# Altium PCB PCB1.PcbDoc
Units mm, origin at the board's own origin, x right, y up, seen from the top; angles counter-clockwise.
Board outline 99.83 x 79.12 mm, 2 copper layers (Top Layer, Bottom Layer); 34 components, 53 nets, 212 pads, 34 vias.
Unrouted connection lines stored in the file: 1.
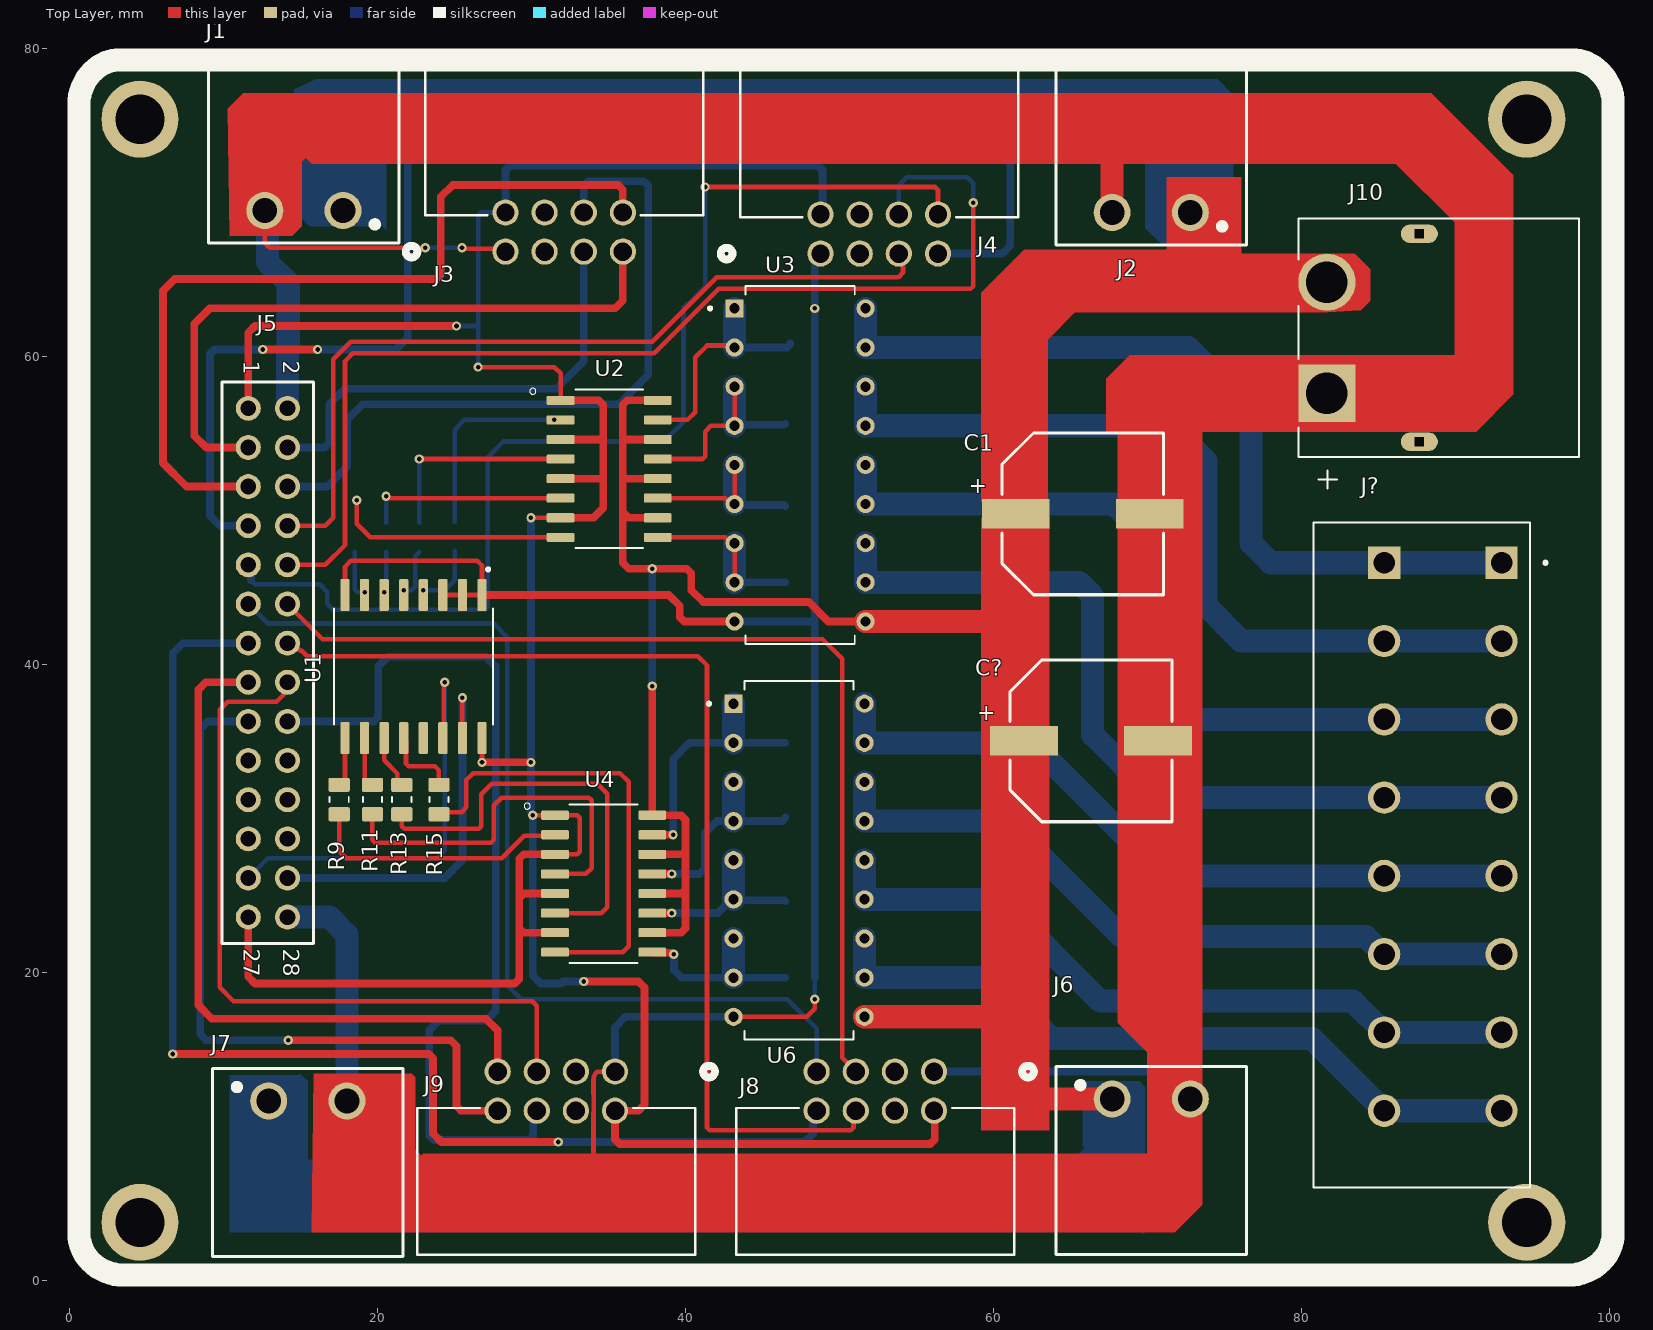
[diagram p0: Top Layer view]
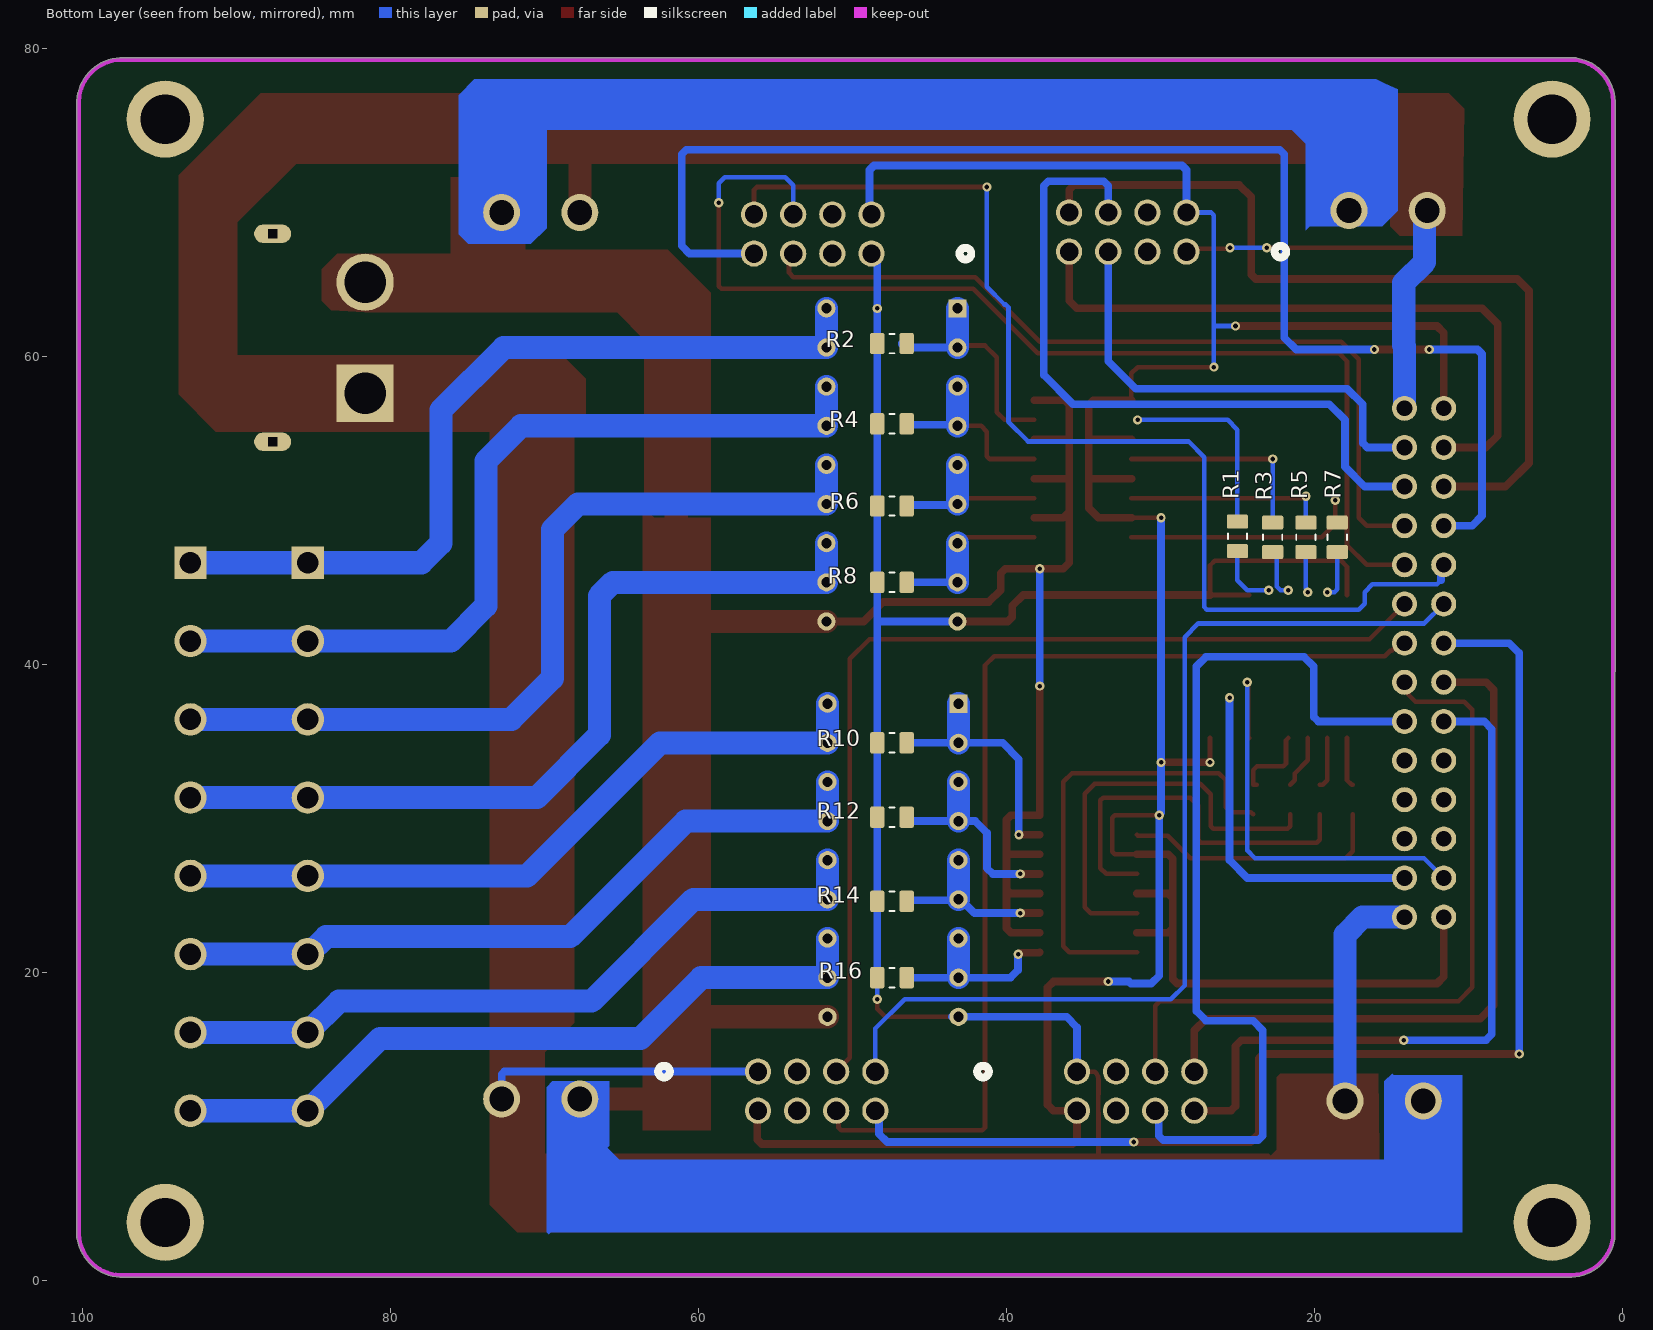
[diagram p1: Bottom Layer view, seen from below]
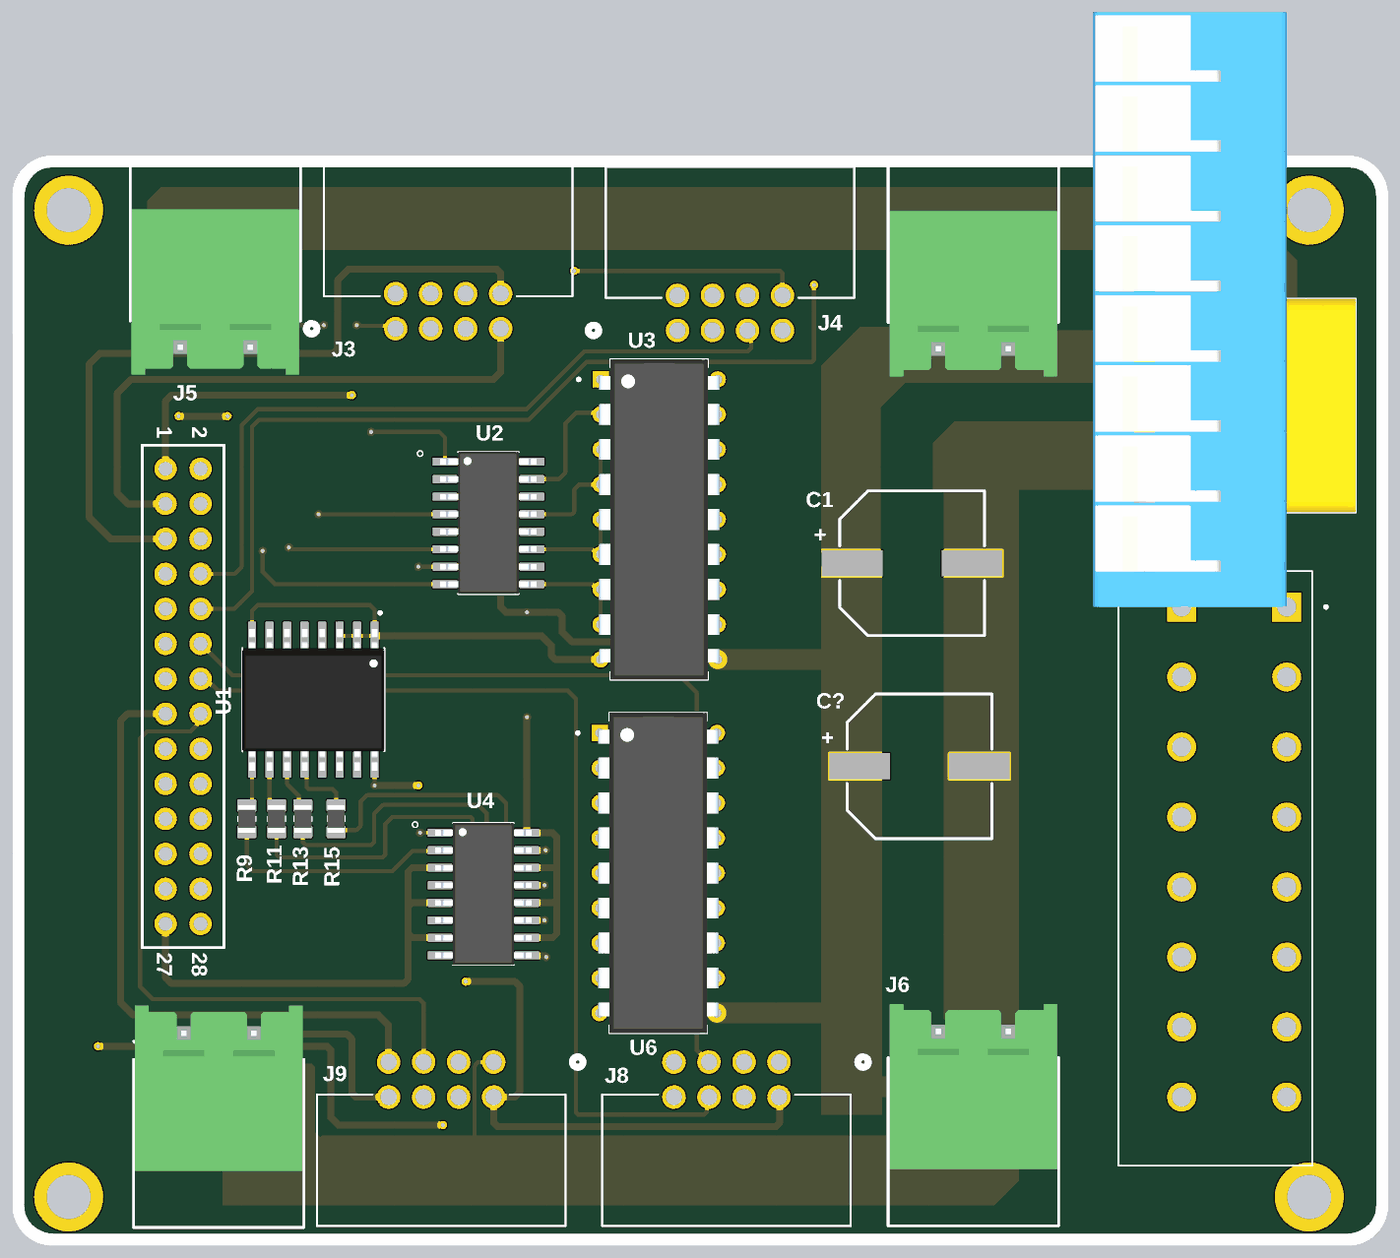
[diagram p2: 3D render of the assembled board from above, using the file's embedded part models]
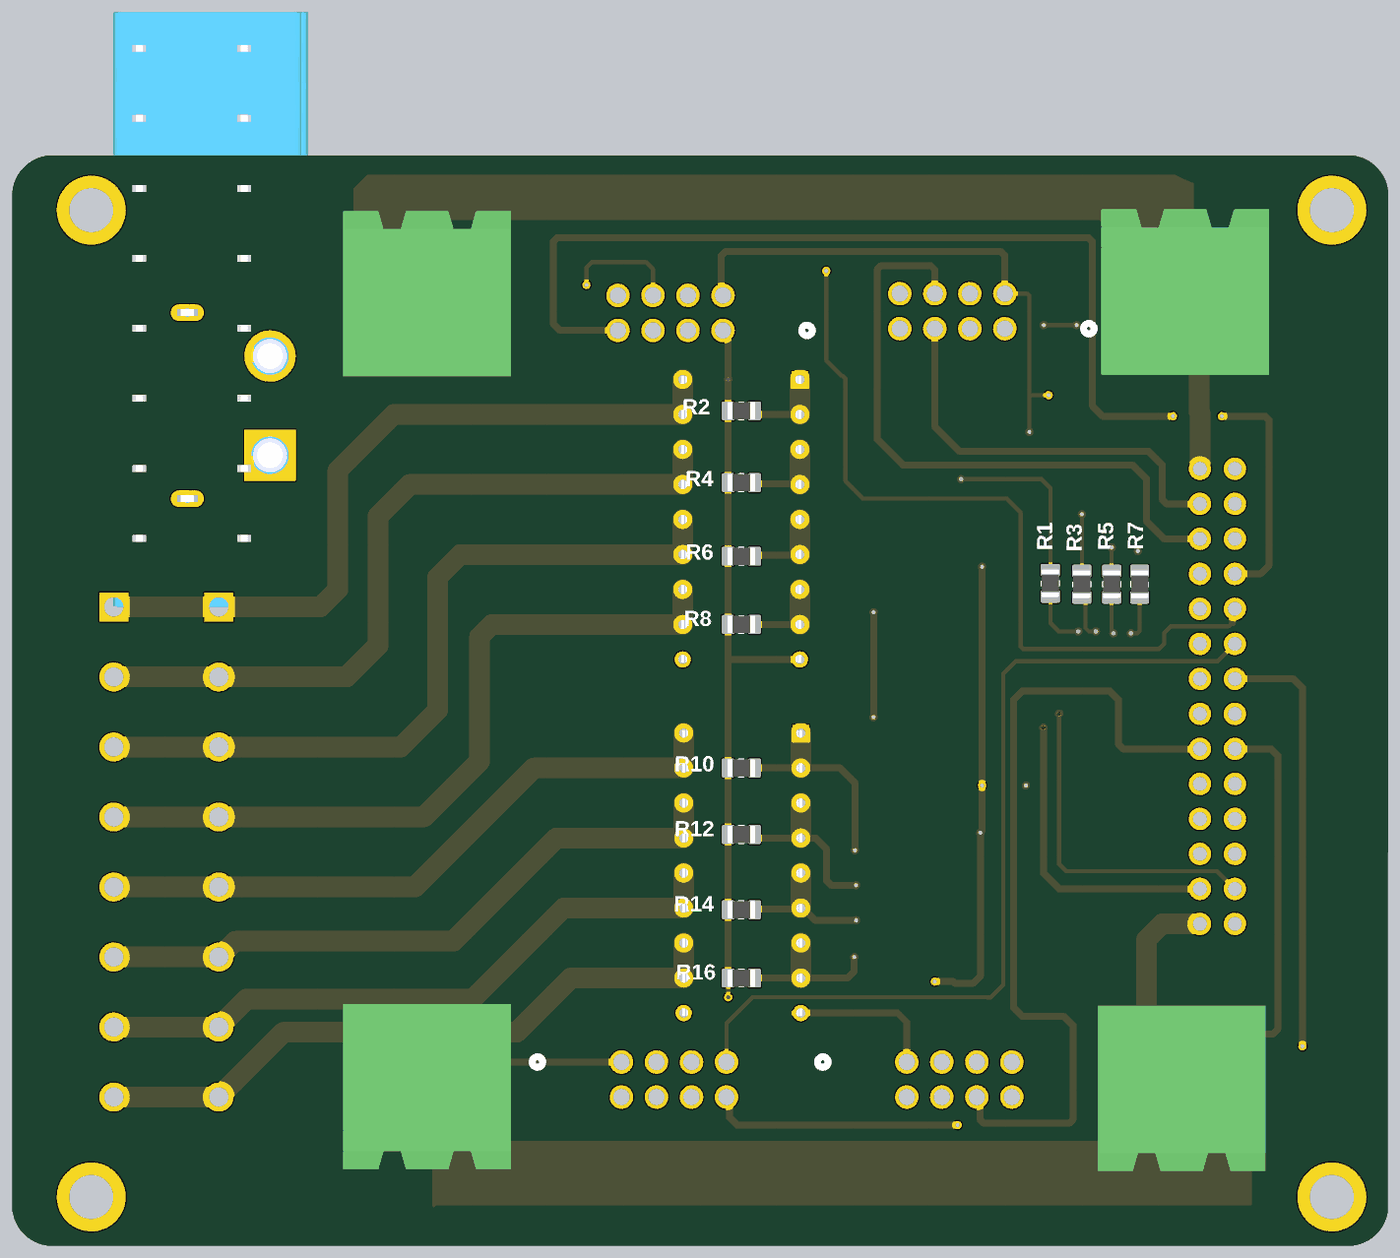
[diagram p3: 3D render of the assembled board from below, using the file's embedded part models]

## Layer stack, top to bottom
Top Solder: solder mask 0.0102, Solder Resist, Dk 3.5
Top Layer: signal copper 0.0356
Dielectric 1: dielectric 0.32, FR-4, Dk 4.8
Bottom Layer: signal copper 0.0356
Bottom Solder: solder mask 0.0102, Solder Resist, Dk 3.5

## Board outline
0.543,2.706 ccw(c3.429,3.175) 3.559,0.254 97.536,0.254 97.542,0.254 ccw(c97.409,3.175) 100.295,2.706 100.33,2.794 100.33,3.045 ccw(c97.409,3.175) 100.333,3.175 ccw(c97.409,3.175) 100.33,3.305 100.33,76.581 100.33,76.587 ccw(c97.409,76.454) 97.279,79.375 3.048,79.375 2.96,79.34 ccw(c3.429,76.454) 0.508,76.324

## Design rules (kind name [scope] priority, off if disabled: settings)
Clearance [InNetClass('12V')] p1: gap=0 ignorepadtopadclearanceinfootprint=FALSE
PolygonConnect [All] p1: connectstyle=Relief reliefconductorwidth=0.254 reliefentries=4 polygonreliefangle="90 Angle" airgapwidth=0.254
RoutingTopology RoutingTopology_1 [All] p1: topology=Shortest
RoutingTopology [All] p2: topology=Shortest
RoutingVias [All] p1: holewidth=0.3 width=0.6 viastyle="Through Hole" minholewidth=0.3 minwidth=0.6 maxholewidth=0.3 maxwidth=0.6
SolderMaskExpansion [All] p1: expansion=0.102 istentingtop=FALSE
Width [All] p1: maxlimit=1.5 minlimit=0.3 preferedwidth=0.5
29 further rules are at their usual default settings.

## Classes and differential pairs
net class 12V: +12

## Components (designator, comment, footprint, x,y, rotation, side; value= is the part's Value field where it differs from the comment)
C1 "WCAP-ASLL_10X10.5" WCAP-ASLL_10X10.5(DXL) 65.786,49.784 r180 top
C? "WCAP-ASLL_10X10.5" WCAP-ASLL_10X10.5(DXL) 66.326,35.052 r180 top
J1 "691313510002" 691313510002 15.24,69.469 r180 top
J2 "691313510002" 691313510002 70.231,69.342 r180 top
J3 "702470851" CONN_7024708XX_MOL 28.321,66.802 r180 top
J4 "702470851" CONN_7024708XX_MOL 48.768,66.675 r180 top
J5 "SAMTEC-HTSW-114-17-X-DJ" SAMTEC-HTSW-114-17-X-D 12.9,40.123 r270 top
J6 "691313510002" 691313510002 70.231,11.811 r0 top
J7 "691313510002" 691313510002 15.494,11.684 r0 top
J8 "702470851" CONN_7024708XX_MOL 56.134,13.589 r0 top
J9 "702470851" CONN_7024708XX_MOL 35.433,13.589 r0 top
J10 "XT60PW-M" AMASS_XT60PW-M 87.63,61.214 r90 top
J? "TBL004-508-08BE-2GY" CUI_TBL004-508-08BE-2GY 92.964,46.609 r270 top
R1 "RC0805FR-1010KL" RESC2012X60N 25.019,48.326 r90 bottom
R2 "RC0805FR-1010KL" RESC2012X60N 47.437,60.833 r0 bottom
R3 "RC0805FR-1010KL" RESC2012X60N 22.733,48.26 r90 bottom
R4 "RC0805FR-1010KL" RESC2012X60N 47.437,55.626 r0 bottom
R5 "RC0805FR-1010KL" RESC2012X60N 20.574,48.26 r90 bottom
R6 "RC0805FR-1010KL" RESC2012X60N 47.437,50.292 r0 bottom
R7 "RC0805FR-1010KL" RESC2012X60N 18.542,48.26 r90 bottom
R8 "RC0805FR-1010KL" RESC2012X60N 47.437,45.339 r0 bottom
R9 "RC0805FR-1010KL" RESC2012X60N 17.526,31.242 r270 top
R10 "RC0805FR-1010KL" RESC2012X60N 47.437,34.925 r0 bottom
R11 "RC0805FR-1010KL" RESC2012X60N 19.685,31.242 r270 top
R12 "RC0805FR-1010KL" RESC2012X60N 47.437,30.099 r0 bottom
R13 "RC0805FR-1010KL" RESC2012X60N 21.59,31.242 r270 top
R14 "RC0805FR-1010KL" RESC2012X60N 47.437,24.638 r0 bottom
R15 "RC0805FR-1010KL" RESC2012X60N 24.003,31.242 r270 top
R16 "RC0805FR-1010KL" RESC2012X60N 47.437,19.685 r0 bottom
U1 "PCF8574DWR" SOIC127P1030X265-16N 22.352,39.878 r270 top
U2 "TLP281-4GB(F)" SOIC127P700X210-16N 35.052,52.705 r0 top
U3 "ULN2803A" DIP850W46P254L2324H393Q18 47.439,52.959 r0 top
U4 "TLP281-4GB(F)" SOIC127P700X210-16N 34.691,25.781 r0 top
U6 "ULN2803A" DIP850W46P254L2324H393Q18 47.371,27.305 r0 top

## Footprints (in the part's own frame and the unit in brackets; to place one, negate y for a bottom-side part, rotate by r counter-clockwise, add the part's x,y. Pads: shape width x height; smd on the part's side, far side on the other; paste and mask are expansions set on the pad)
691313510002 [mm]
  round 2.4 hole 1.6: 1(-2.54,0) 2(2.54,0)
  silkscreen extent -6.18,-10.1 6.18,2.1, body extent -6.08,-6 6.08,6, height 7.55
AMASS_XT60PW-M [mm]
  rect 3.716x3.716 / inner round 3.716 / far side rect 3.716x3.716 hole 2.7 mask+0.102: 1(-3.6,6)
  round 3.716 hole 2.7 mask+0.102: 2(3.6,6)
  oval 1.2x2.4 hole 0.6 square mask+0.102: SH1(-6.75,0) SH2(6.75,0)
  silkscreen extent -9.8,-10.35 7.75,7.85, body extent -7.75,-10.35 7.75,7.85, height 8.4
CONN_7024708XX_MOL [mil]
  round 67 hole 47 mask+4.02: 1(0,0) 2(-100,0) 3(-200,0) 4(-300,0) 5(0,-100) 6(-100,-100) 7(-200,-100) 8(-300,-100)
  silkscreen extent -505,-468 255,15
CUI_TBL004-508-08BE-2GY [mm]
  rect 2.1x2.1 / inner round 2.1 / far side rect 2.1x2.1 hole 1.4 mask+0.102: 1_A(0,0) 1_B(0,-7.62)
  round 2.1 hole 1.4 mask+0.102: 2_A(5.08,0) 2_B(5.08,-7.62) 3_A(10.16,0) 3_B(10.16,-7.62) 4_A(15.24,0) 4_B(15.24,-7.62) 5_A(20.32,0) 5_B(20.32,-7.62) 6_A(25.4,0) 6_B(25.4,-7.62) 7_A(30.48,0) 7_B(30.48,-7.62) 8_A(35.56,0) 8_B(35.56,-7.62)
  silkscreen extent -2.6,-12.2 40.54,2.95, body extent -43.14,-14.05 0,0, height 13.3
DIP850W46P254L2324H393Q18 [mm]
  rect 1.178x1.178 / inner round 1.178 / far side rect 1.178x1.178 hole 0.67: 1(-4.25,10.16)
  round 1.178 hole 0.67: 2(-4.25,7.62) 3(-4.25,5.08) 4(-4.25,2.54) 5(-4.25,0) 6(-4.25,-2.54) 7(-4.25,-5.08) 8(-4.25,-7.62) 9(-4.25,-10.16) 10(4.25,-10.16) 11(4.25,-7.62) 12(4.25,-5.08) 13(4.25,-2.54) 14(4.25,0) 15(4.25,2.54) 16(4.25,5.08) 17(4.25,7.62) 18(4.25,10.16)
  silkscreen extent -5.94,-11.62 3.55,11.62, body extent -4.38,-11.62 4.38,11.62, height 3.93
RESC2012X60N [mm]
  rrect25% 0.92x1.38 smd: 1(-0.955,0) 2(0.955,0)
  silkscreen extent -0.18,-0.63 0.18,0.63, body extent -1,-0.63 1,0.63, height 0.6
SAMTEC-HTSW-114-17-X-D [mm]
  round 1.62 hole 1.02: 1(-16.51,-1.27) 2(-16.51,1.27) 3(-13.97,-1.27) 4(-13.97,1.27) 5(-11.43,-1.27) 6(-11.43,1.27) 7(-8.89,-1.27) 8(-8.89,1.27) 9(-6.35,-1.27) 10(-6.35,1.27) 11(-3.81,-1.27) 12(-3.81,1.27) 13(-1.27,-1.27) 14(-1.27,1.27) 15(1.27,-1.27) 16(1.27,1.27) 17(3.81,-1.27) 18(3.81,1.27) 19(6.35,-1.27) 20(6.35,1.27) 21(8.89,-1.27) 22(8.89,1.27) 23(11.43,-1.27) 24(11.43,1.27) 25(13.97,-1.27) 26(13.97,1.27) 27(16.51,-1.27) 28(16.51,1.27)
  silkscreen extent -18.23,-2.96 18.23,2.96
SOIC127P700X210-16N [mm]
  rrect25% 1.8x0.59 smd: 1(-3.155,4.445) 2(-3.155,3.175) 3(-3.155,1.905) 4(-3.155,0.635) 5(-3.155,-0.635) 6(-3.155,-1.905) 7(-3.155,-3.175) 8(-3.155,-4.445) 9(3.155,-4.445) 10(3.155,-3.175) 11(3.155,-1.905) 12(3.155,-0.635) 13(3.155,0.635) 14(3.155,1.905) 15(3.155,3.175) 16(3.155,4.445)
  silkscreen extent -5.15,-5.15 2.2,5.23, body extent -3.5,-5.15 3.5,5.15, height 2.1
SOIC127P1030X265-16N [mm]
  rrect25% 2.06x0.6 smd paste+0 mask+0.102: 1(-4.64,4.445) 2(-4.64,3.175) 3(-4.64,1.905) 4(-4.64,0.635) 5(-4.64,-0.635) 6(-4.64,-1.905) 7(-4.64,-3.175) 8(-4.64,-4.445) 9(4.64,-4.445) 10(4.64,-3.175) 11(4.64,-1.905) 12(4.64,-0.635) 13(4.64,0.635) 14(4.64,1.905) 15(4.64,3.175) 16(4.64,4.445)
  silkscreen extent -6.4,-5.15 3.75,5.15, body extent -5.15,-5.15 5.15,5.15, height 2.65
WCAP-ASLL_10X10.5(DXL) [mm]
  rect 4.4x1.9 smd paste+0 mask+0.102: 1(4.35,0) 2(-4.35,0)
  silkscreen extent -5.25,-5.25 5.25,5.25

## Part data
C1 C? U3 U6: Package=None, Availability=Unavailable, Price=None
  C1 C?: MF="{'manufacturer': u'W\xfcrth Elektronik'}", MP=865060457009
  U3 U6: MP=ULN2803A
J1 J2 J6 J7: "313; 5.08mm Pitch Straight Pluggable Term Block, PCB Header, Through Hole, 2 Way", Package=None, Check_prices=https://www.snapeda.com/parts/691313510002/W%25C3%25BCrth+Elektronik+Midcom/view-part/?ref=eda, MF="WÃ¼rth Elektronik", MP=691313510002, SnapEDA_Link=https://www.snapeda.com/parts/691313510002/W%25C3%25BCrth+Elektronik+Midcom/view-part/?ref=snap
J3 J4 J8 J9: "Conn Shrouded Header (4 Sides) HDR 8 POS 2.54mm Solder RA Thru-Hole C-GridÂ® Tray", Package=None, Check_prices=https://www.snapeda.com/parts/702470851/Molex/view-part/?ref=eda, MF=Molex, MP=702470851, SnapEDA_Link=https://www.snapeda.com/parts/702470851/Molex/view-part/?ref=snap
J10: "Socket, DC supply, male, PIN: 2", Package=Package, Check_prices=https://www.snapeda.com/parts/XT60PW-M/AMASS/view-part/?ref=eda, MF=AMASS, MP=XT60PW-M, SnapEDA_Link=https://www.snapeda.com/parts/XT60PW-M/AMASS/view-part/?ref=snap
J?: "2~24 Poles, Screwless, Horizontal, 5.08 Pitch, 24~14 (AWG), Terminal Block Connector", Package=None, Check_prices=https://www.snapeda.com/parts/TBL004-508-08BE-2GY/Same+Sky/view-part/?ref=eda, MF="Same Sky", MP=TBL004-508-08BE-2GY, SnapEDA_Link=https://www.snapeda.com/parts/TBL004-508-08BE-2GY/Same+Sky/view-part/?ref=snap
R1 R2 R3 R4 R5 R6 R7 R8 R9 R10 R11 R12 R13 R14 R15 R16: "RES, THICK FILM, 10K, 1%, 0.125W, 0805;; RES, THICK FILM, 10K, 1%, 0.125W, 0805; Resistance:10kohm; Resistance Tolerance:Â± 1%; Power Rating:125mW; Resistor Case Style:0805 ^2012 Metric]; Resistor Technology:Thick Film; Resistor Type:General Purpose; Prod", Package="0805-2 YAGEO", Check_prices=https://www.snapeda.com/parts/RC0805FR1010KL/Yageo/view-part/?ref=eda, MF="Yageo Corporation", MP=RC0805FR1010KL, SnapEDA_Link=https://www.snapeda.com/parts/RC0805FR1010KL/Yageo/view-part/?ref=snap
U1: "8-bit 2.5- to 5.5-V I2C/SMBus I/O expander with interrupt", Package="SOIC-16 Texas Instruments", Check_prices=https://www.snapeda.com/parts/PCF8574DWR/Texas+Instruments/view-part/?ref=eda, MF="Texas Instruments", MP=PCF8574DWR, SnapEDA_Link=https://www.snapeda.com/parts/PCF8574DWR/Texas+Instruments/view-part/?ref=snap
U2 U4: "Optocoupler DC-IN 4-CH Transistor DC-OUT 16-Pin SOP", Package="SOP-16 Toshiba", Check_prices=https://www.snapeda.com/parts/TLP281-4GB(F)/Toshiba/view-part/?ref=eda, MF=Toshiba, MP=TLP281-4GB(F), SnapEDA_Link=https://www.snapeda.com/parts/TLP281-4GB(F)/Toshiba/view-part/?ref=snap

## Free pads (board coordinates)
  round 5 hole 3.2: 3(4.6,3.8) 3(4.6,75.4) 3(94.6,3.8) 3(94.6,75.4)

## Via types
v1: diameter 0.6, hole 0.3, Top Layer to Bottom Layer, tented both sides, 23 vias
v2: diameter 0.6, hole 0.3, Top Layer to Bottom Layer, 11 vias

## Nets (pads, with @x,y where several pads share a name; then routed paths per layer and width w, separated by ;. In a path a pad name is that pad's centre, name@x,y a point inside that pad or via, vN(x,y) a via of type N, cw(c..) or ccw(c..) an arc to the next point about the centre after c; other vN are vias at no path point)
+5: J3.5 J4.5 J5.1 J5.27 J8.5 J9.5 U1.16 U2.1 U2.3 U2.5 U2.7 U4.1 U4.3 U4.5 U4.7 | length 206.1
  Top Layer w0.3: v1(26.543,59.309) 31.496,59.309 31.897,58.908 U2.1 ; v1(26.797,33.655) U1.16 ; v1(29.972,49.53) U2.7 ; v1(30.099,30.226) U4.1 32.971,30.226 33.147,30.05 33.147,27.862 32.971,27.686 U4.3
  Top Layer w0.5: J5.27 11.63,19.739 12.065,19.304 28.917,19.304 29.21,19.597 29.21,22.899 ; J5.1 11.63,61.541 12.065,61.976 v2(25.146,61.976) ; v1(26.797,33.655) v2(29.972,33.655) ; U4.7 29.503,22.606 29.21,22.899 ; U4.5 29.503,25.146 29.21,24.853 ; U4.3 29.503,27.686 29.21,27.393 29.21,24.853 ; U2.7 34.036,49.53 34.671,50.165 34.671,52.07 ; U2.5 34.671,52.07 ; U2.3 34.544,54.61 34.671,54.737 ; U2.1 34.378,57.15 34.671,56.857 34.671,54.737 ; v2(33.401,19.431) 36.957,19.431 37.338,19.05 37.338,11.43 36.957,11.049 J9.5 35.433,9.183 35.726,8.89 55.888,8.89 56.181,9.183 56.181,11.002 J8.5 ; 29.21,22.899 29.21,24.853 ; 34.671,52.07 34.671,54.737
  Bottom Layer w0.3: v2(25.146,61.976) 26.543,61.976 ; v1(26.543,59.309) 26.543,61.976 ; J3.5 26.719,69.342 26.543,69.166 26.543,61.976
  Bottom Layer w0.5: J3.5 28.321,72.097 28.614,72.39 48.602,72.39 48.895,72.097 48.895,69.342 J4.5 ; v1(29.972,49.53) v2(29.972,33.655) 29.972,30.38 30.099,30.253 v1(30.099,30.226) 30.099,19.812 30.607,19.304 31.927,19.304 32.054,19.431 v2(33.401,19.431)
+12: C1.1 C?.1 J1.1 J2.1 J6.1 J7.1 J10.2 U2.10 U2.12 U2.14 U2.16 U3.10 U4.10 U4.12 U4.14 U4.16 U6.10 | length 261.3
  Top Layer w0.5: U4.10 39.712,22.606 40.005,22.899 40.005,25.4 ; U4.12 39.751,25.146 40.005,25.4 ; U4.14 39.986,27.686 40.005,27.667 ; v1(37.846,38.608) U4.16 39.712,30.226 40.005,29.933 40.005,27.667 ; U2.10 36.322,49.53 35.941,49.911 ; U2.12 35.941,52.07 ; U2.14 36.068,54.61 35.941,54.737 ; U2.16 36.234,57.15 35.941,56.857 35.941,54.737 ; U3.10 49.276,42.799 48.006,44.069 41.148,44.069 40.386,44.831 40.386,45.935 40.093,46.228 v1(37.846,46.228) 36.322,46.228 35.941,46.609 35.941,49.911 ; 35.941,49.911 35.941,52.07 ; 35.941,52.07 35.941,54.737 ; 40.005,25.4 40.005,27.667
  Top Layer w1.5: U6.10 62.367,17.145 ; U3.10 60.071,42.799 61.436,44.164 C1.1 ; C?.1 62.167,35.052 62.367,34.852 62.367,17.145 ; J6.1 63.246,11.811 62.367,12.69 62.367,17.145 ; 72.771,63.617 J2.1
  Bottom Layer w0.5: v1(37.846,38.608) v1(37.846,46.228)
  Bottom Layer w1.5: J7.1 12.954,7.366 15.24,5.08 66.294,5.08 67.691,6.477 J6.1 ; J1.1 17.78,73.533 19.685,75.438 71.247,75.438 72.771,73.914 J2.1
ENA1: J3.3 J5.4 | length 30.1
  Bottom Layer w0.5: J5.4 16.598,54.093 16.891,54.386 16.891,56.896 17.907,57.912 31.623,57.912 33.401,59.69 J3.3
ENA2: J3.7 J5.6 | length 46.7
  Bottom Layer w0.5: J5.6 16.755,51.553 18.034,52.832 18.034,55.88 19.05,56.896 35.687,56.896 37.592,58.801 37.592,71.081 37.299,71.374 33.694,71.374 33.401,71.081 J3.7
ENB1: J4.3 J5.8 | length 54.1
  Top Layer w0.3: J5.8 16.628,49.013 17.145,49.53 17.145,59.817 18.288,60.96 37.846,60.96 42.037,65.151 53.848,65.151 54.116,65.419 54.116,66.407 J4.3
ENB2: J4.7 J5.10 | length 72.8
  Top Layer w0.3: J5.10 16.628,46.473 17.907,47.752 17.907,59.69 18.415,60.198 37.973,60.198 42.164,64.389 58.498,64.389 58.674,64.565 v2(58.674,69.977)
  Bottom Layer w0.3: J4.7 53.848,70.516 53.845,70.519 53.845,71.117 54.356,71.628 58.293,71.628 58.674,71.247 v2(58.674,69.977)
ENC1: J5.12 J8.3 | length 64.6
  Top Layer w0.3: J5.12 16.447,41.656 48.895,41.656 50.165,40.386 50.165,14.478 J8.3
ENC2: J5.14 J8.7 | length 68.6
  Top Layer w0.3: J5.14 14.507,41.393 15.006,40.894 15.113,40.894 15.459,40.548 40.81,40.548 41.402,39.956 41.402,9.955 41.578,9.779 50.733,9.779 50.909,9.955 50.909,10.904 J8.7
END1: J5.16 J9.3 | length 48.8
  Top Layer w0.3: J5.16 13.917,38.6 13.917,38.047 13.462,37.592 10.287,37.592 9.779,37.084 9.779,19.05 10.668,18.161 30.06,18.161 30.353,17.868 J9.3
END2: J5.18 J9.7 | length 60.2
  Bottom Layer w0.5: J5.18 19.773,36.313 20.066,36.606 20.066,39.878 20.701,40.513 27.051,40.513 27.686,39.878 27.686,17.526 27.051,16.891 24.003,16.891 23.368,16.256 23.368,9.437 23.661,9.144 29.83,9.144 30.123,9.437 30.123,10.819 J9.7
GND: C1.2 C?.2 J1.2 J2.2 J3.1 J4.1 J5.2 J5.28 J6.2 J7.2 J8.1 J9.1 J10.1 R2.2 R4.2 R6.2 R8.2 R10.2 R12.2 R14.2 R16.2 U1.1 U1.2 U1.3 U1.8 U3.9 U6.9 | length 377.8
  Top Layer w0.3: J1.2 12.7,67.528 ccw(c13,67.528) 12.75,67.362 12.865,67.19 ccw(c13.114,67.356) 13.114,67.056 v1(23.114,67.056) ; U1.8 17.907,46.355 18.288,46.736 26.494,46.736 26.797,46.433 U1.1 U1.2 U1.3 ; v1(25.501,67.056) 25.558,66.999 28.124,66.999 J3.1 ; 33.909,6.223 ccw(c33.602,6.53) 34.036,6.53 34.036,10.899 cw(c34.336,10.898) 34.038,10.928 ccw(c32.893,11.049) 34.044,11.057 34.036,13.081 cw(c34.649,13.081) 34.216,13.515 34.29,13.589 J9.1 ; U6.9 47.879,17.145 48.387,17.653 v2(48.387,18.288)
  Top Layer w0.5: U1.1 38.921,44.518 39.624,43.815 39.624,43.092 39.917,42.799 U3.9
  Top Layer w1.5: J1.2 12.7,73.162 13.579,74.041 68.57,74.041 ; J7.2 18.034,7.102 18.913,6.223 33.909,6.223 71.257,6.223 72.771,7.737 J6.2 72.771,33.782 71.501,35.052 C?.2 ; J2.2 67.691,73.162 68.57,74.041 ; J10.1 89.628,57.614 91.186,59.172 91.186,71.501 88.646,74.041 68.57,74.041
  Bottom Layer w0.3: v1(23.114,67.056) v1(25.501,67.056) ; v2(48.387,18.288) 48.389,18.29 48.389,19.683 R16.2
  Bottom Layer w0.5: J9.1 35.433,16.471 36.107,17.145 U6.9 U6.9@43.561,17.145 ; U3.9 48.262,42.799 48.389,42.672 ; v1(48.387,63.119) 48.389,63.117 48.389,42.672 ; v1@48.387,63.146 48.387,65.969 48.768,66.35 J4.1 ; R16.2 48.389,19.687 48.389,42.672 ; J8.1 72.595,13.589 72.771,13.413 J6.2
  Bottom Layer w1.5: J1.2 12.872,69.297 12.872,66.122 14.224,64.77 14.224,60.745 14.17,60.691 J5.2 ; J5.28 16.901,23.613 18.034,22.48 J7.2
NetR1_2: R1.2 U2.2 | length 12.7
  Bottom Layer w0.3: R1.2 25.019,55.245 25.654,55.88 v1(31.496,55.88)
NetR3_2: R3.2 U2.4 | length 13.3
  Top Layer w0.3: v1(22.733,53.34) U2.4
  Bottom Layer w0.3: R3.2 v1(22.733,53.34)
NetR5_2: R5.2 U2.6 | length 13.1
  Top Layer w0.3: v1(20.574,50.927) 20.655,50.927 20.782,50.8 U2.6
  Bottom Layer w0.3: R5.2 v1(20.574,50.927)
NetR7_2: R7.2 U2.8 | length 15.1
  Top Layer w0.3: v1(18.669,50.673) 18.669,49.149 19.558,48.26 U2.8
NetR9_2: R9.2 U4.2 | length 17.2
  Top Layer w0.3: R9.2 17.526,27.885 17.979,27.432 28.067,27.432 29.531,28.896 31.476,28.896 U4.2
NetR11_2: R11.2 U4.4 | length 25.5
  Top Layer w0.3: R11.2 19.685,28.624 19.861,28.448 27.383,28.448 27.559,28.624 27.559,30.861 28.067,31.369 33.733,31.369 33.909,31.193 33.909,26.797 33.528,26.416 U4.4
NetR13_2: R13.2 U4.6 | length 27.8
  Top Layer w0.3: R13.2 21.59,29.513 21.766,29.337 26.582,29.337 26.757,29.513 26.757,31.583 27.432,32.258 34.29,32.258 34.925,31.623 34.925,24.257 34.544,23.876 U4.6
NetR15_2: R15.2 U4.8 | length 30.3
  Top Layer w0.3: R15.2 24.144,30.428 25.475,30.428 25.781,30.734 25.781,32.512 26.22,32.951 35.756,32.951 36.322,32.385 36.322,21.717 35.941,21.336 U4.8
OUT1: R2.1 U2.15 U3.1 U3.2 | length 15.4
  Top Layer w0.3: U2.15 40.132,55.88 40.64,56.388 40.64,59.944 41.402,60.706 43.062,60.706 U3.2
  Bottom Layer w0.5: U3.2 46.587,60.579 46.797,60.789 R2.1@46.797,60.833
  Bottom Layer w1.5: U3.2 U3.1
OUT2: R4.1 U2.13 U3.3 U3.4 | length 15.2
  Top Layer w0.3: U2.13 41.099,53.34 41.275,53.516 41.275,55.118 41.656,55.499 U3.4 U3.3
  Bottom Layer w0.5: U3.4 43.253,55.562 46.419,55.562 R4.1
  Bottom Layer w1.5: U3.4 U3.3
OUT3: R6.1 U2.11 U3.5 U3.6 | length 13.6
  Top Layer w0.3: U2.11 42.574,50.8 42.955,50.419 U3.6 U3.5
  Bottom Layer w0.5: U3.6 43.253,50.355 46.419,50.355 R6.1
  Bottom Layer w1.5: U3.6 U3.5
OUT4: R8.1 U2.9 U3.7 U3.8 | length 13.5
  Top Layer w0.3: U2.9 42.57,48.26 42.951,47.879 U3.7 U3.8
  Bottom Layer w0.5: U3.8 R8.1
  Bottom Layer w1.5: U3.8 U3.7
OUT5: R10.1 U4.15 U6.1 U6.2 | length 16.5
  Top Layer w0.5: U4.15 v1(39.201,28.956)
  Bottom Layer w0.5: v1(39.201,28.956) 39.201,33.867 40.259,34.925 U6.2 R10.1
  Bottom Layer w1.5: U6.2 U6.1
OUT6: R12.1 U4.13 U6.3 U6.4 | length 14.1
  Top Layer w0.5: U4.13 v1(39.116,26.416)
  Bottom Layer w0.5: v1(39.116,26.416) 40.894,26.416 41.275,26.797 41.275,29.083 42.037,29.845 U6.4 46.272,29.845 46.482,30.055 R12.1
  Bottom Layer w1.5: U6.4 U6.3
OUT7: R14.1 U4.11 U6.5 U6.6 | length 11.6
  Top Layer w0.5: U4.11 v1(39.116,23.876)
  Bottom Layer w0.5: v1(39.116,23.876) 42.078,23.876 42.967,24.765 U6.6 43.185,24.701 46.419,24.701 R14.1
  Bottom Layer w1.5: U6.6 U6.5
OUT8: R16.1 U4.9 U6.7 U6.8 | length 12.5
  Top Layer w0.5: U4.9 37.891,21.291 39.134,21.291 39.216,21.209 v1(39.243,21.209)
  Bottom Layer w0.5: v1(39.243,21.209) 39.262,21.19 39.262,20.174 39.751,19.685 U6.8 R16.1
  Bottom Layer w1.5: U6.8 U6.7
P0: R1.1 U1.4 | length 4.2
  Bottom Layer w0.3: v1(22.987,44.831) 24.384,44.831 25.019,45.466 R1.1
P1: R3.1 U1.5 | length 3.2
  Bottom Layer w0.3: v1(21.717,44.831) 22.225,44.831 22.465,45.071 22.465,47.037 R3.1
P2: R5.1 U1.6 | length 2.7
  Bottom Layer w0.3: v1(20.447,44.704) 20.447,44.785 20.574,44.912 R5.1
P3: R7.1 U1.7 | length 3.1
  Bottom Layer w0.3: R7.1 18.542,44.881 18.718,44.705 19.176,44.705 v1(19.177,44.704)
P4: R9.1 U1.9 | length 3.2
  Top Layer w0.3: R9.1 17.597,32.197 17.907,32.507 U1.9
P5: R11.1 U1.10 | length 3.4
  Top Layer w0.3: U1.10 19.177,32.507 19.487,32.197 R11.1
P6: R13.1 U1.11 | length 3.5
  Top Layer w0.3: U1.11 20.447,33.782 21.298,32.931 21.298,32.489 R13.1
P7: R15.1 U1.12 | length 5.2
  Top Layer w0.3: U1.12 21.867,35.088 21.867,33.577 22.043,33.401 23.749,33.401 23.875,33.275 24.003,33.147 R15.1 R15.1@23.773,32.197
PWM_A1: J3.4 J5.3 | length 42.7
  Top Layer w0.5: J5.3 8.899,54.093 8.128,54.864 8.128,62.103 9.144,63.119 35.433,63.119 35.941,63.627 J3.4
PWM_A2: J3.8 J5.5 | length 54.6
  Top Layer w0.5: J5.5 7.629,51.553 6.096,53.086 6.096,64.262 6.858,65.024 23.837,65.024 24.13,65.317 24.13,70.358 24.892,71.12 35.648,71.12 35.941,70.827 J3.8
PWM_B1: J4.4 J5.7 | length 88.6
  Top Layer w0.5: v2(12.573,60.452) v2(16.129,60.452)
  Bottom Layer w0.5: J5.7 9.788,49.013 9.144,49.657 9.144,60.159 9.437,60.452 v2(12.573,60.452) ; v2(16.129,60.452) 21.209,60.452 21.971,61.214 21.971,73.113 22.264,73.406 60.794,73.406 61.087,73.113 61.087,67.183 60.579,66.675 J4.4
PWM_B2: J4.8 J5.9 | length 73.8
  Top Layer w0.3: v2(41.275,70.993) 56.212,70.993 56.388,70.817 J4.8
  Bottom Layer w0.3: 11.811,45.466 12.065,45.212 16.256,45.212 16.764,44.704 16.764,43.942 17.145,43.561 27.002,43.561 27.178,43.737 27.178,53.467 28.194,54.483 38.608,54.483 39.878,55.753 39.878,63.197 40.054,63.373 40.132,63.373 41.275,64.516 v2(41.275,70.993)
  Bottom Layer w0.5: J5.9 11.811,46.292 11.811,45.466
PWM_C1: J5.11 J8.4 | length 64.3
  Bottom Layer w0.3: J5.11 12.891,42.672 27.559,42.672 28.448,41.783 28.448,19.177 29.34,18.285 29.588,18.285 29.591,18.288 46.609,18.288 48.514,16.383 J8.4
PWM_C2: J5.13 J8.8 | length 79.8
  Top Layer w0.5: v2(6.731,14.732) 23.329,14.732 23.622,14.439 23.622,9.564 24.169,9.017 v2(31.75,9.017)
  Bottom Layer w0.5: v2(6.731,14.732) 6.731,40.749 7.375,41.393 J5.13 ; v2(31.75,9.017) 47.752,9.017 48.284,9.549 48.284,10.819 J8.8
PWM_D1: J5.15 J9.4 | length 46.7
  Top Layer w0.5: J5.15 8.881,38.853 8.382,38.354 8.382,17.907 9.271,17.018 27.051,17.018 27.813,16.256 J9.4
PWM_D2: J5.17 J9.8 | length 46.8
  Top Layer w0.5: v2(14.224,15.621) 24.765,15.621 25.146,15.24 25.146,11.342 25.439,11.049 J9.8
  Bottom Layer w0.5: J5.17 9.008,36.313 8.509,35.814 8.509,16.002 8.89,15.621 v2(14.224,15.621)
SCL_VAN: J5.25 U1.14 | length 28.1
  Top Layer w0.3: U1.14 24.327,35.308 24.327,38.805 v1(24.384,38.862)
  Bottom Layer w0.3: J5.25 12.909,27.432 23.876,27.432 24.384,27.94 v1(24.384,38.862)
SDA_VAN: J5.26 U1.15 | length 25
  Top Layer w0.3: U1.15 v1(25.527,37.846)
  Bottom Layer w0.5: J5.26 24.375,26.153 25.527,27.305 v1(25.527,37.846)
VAN_1: J?.1_A J?.1_B U3.17 U3.18 | length 54.7
  Bottom Layer w1.5: U3.18 U3.17 72.644,60.579 76.708,56.515 76.708,47.879 77.978,46.609 J?.1_B J?.1_A
VAN_2: J?.2_A J?.2_B U3.15 U3.16 | length 55.1
  Bottom Layer w1.5: U3.16 U3.15 71.501,55.499 73.787,53.213 73.787,43.815 76.073,41.529 J?.2_B J?.2_A
VAN_3: J?.3_A J?.3_B U3.13 U3.14 | length 55.3
  Bottom Layer w1.5: U3.14 U3.13 67.818,50.419 69.469,48.768 69.469,39.116 72.136,36.449 J?.3_B J?.3_A
VAN_4: J?.4_A J?.4_B U3.11 U3.12 | length 54.9
  Bottom Layer w1.5: U3.12 U3.11 65.542,45.339 66.421,44.46 66.421,35.433 70.485,31.369 J?.4_B J?.4_A
VAN_5: J?.5_A J?.5_B U6.17 U6.18 | length 47.5
  Bottom Layer w1.5: U6.18 U6.17 62.484,34.925 71.12,26.289 J?.5_B J?.5_A
VAN_6: J?.6_A J?.6_B U6.15 U6.16 | length 47.5
  Bottom Layer w1.5: U6.16 U6.15 60.833,29.845 68.326,22.352 84.165,22.352 85.308,21.209 J?.6_A
VAN_7: J?.7_A J?.7_B U6.13 U6.14 | length 47.5
  Bottom Layer w1.5: U6.14 U6.13 60.325,24.765 66.929,18.161 83.312,18.161 J?.7_B J?.7_A
VAN_8: J?.8_A J?.8_B U6.11 U6.12 | length 47.5
  Bottom Layer w1.5: U6.12 U6.11 59.817,19.685 63.754,15.748 80.645,15.748 J?.8_B J?.8_A
pads on no net: J3.2 J3.6 J4.2 J4.6 J5.19 J5.20 J5.21 J5.22 J5.23 J5.24 J8.2 J8.6 J9.2 J9.6 J10.SH1 J10.SH2 U1.13

## Keep-outs
Keep-Out Layer:
  lines w0.254: 0.635,2.794 0.635,76.327 cw(c3.429,76.454) 3.302,79.248 ; 0.635,3.048 ccw(c3.429,3.175) 3.556,0.381 97.536,0.381 ccw(c97.409,3.175) 100.203,3.302 ; 3.048,79.248 97.282,79.248 cw(c97.409,76.454) 100.203,76.581 100.203,2.794

## Other copper
Top Layer:
  region net GND: 10.414,67.818 14.478,67.818 15.113,68.453 15.113,72.644 15.367,72.898 15.748,72.517 86.106,72.517 89.916,68.707 89.916,60.071 68.834,60.071 67.31,58.547 67.31,55.118 91.313,55.118 93.726,57.531 93.726,71.755 88.392,77.089 11.303,77.089 10.287,76.073
  region net GND: 15.875,13.462 22.225,13.462 22.479,13.208 22.479,8.509 22.86,8.128 22.987,8.255 69.977,8.255 69.977,14.859 68.072,16.764 73.533,16.764 73.533,4.953 71.755,3.175 15.748,3.175
  region net +12: 63.627,9.779 59.182,9.779 59.182,49.53 62.865,49.53 63.373,50.038 63.627,49.784
  region net GND: 68.072,55.622 68.072,16.764 73.533,16.764 73.533,57.316
  region net +12: 71.374,66.929 61.976,66.929 59.182,64.135 59.182,50.546 63.5,50.546 63.5,61.087 65.278,62.865 73.66,62.865
  region net +12: 81.661,62.865 71.247,62.865 71.247,71.628 76.073,71.628 76.073,66.675 83.439,66.675 84.455,65.659 84.455,63.627 83.82,62.992
  region net GND: 73.787,56.007 72.39,54.61 71.882,54.61 71.882,56.388 72.136,56.134 72.136,56.007 71.374,56.769
  region net GND: 91.906,59.309 70.104,59.309 68.072,57.277 68.072,49.784 72.517,49.784 72.517,55.88 91.906,55.88
Bottom Layer:
  region net +12: 20.574,68.199 20.32,68.453 15.621,68.453 14.605,69.469 14.605,77.343 15.494,77.724 16.002,77.978 74.549,77.978 75.565,76.962 75.565,67.945 74.93,67.31 70.866,67.31 69.85,68.326 69.85,75.057 21.844,75.057 20.574,73.787
  region net +12: 10.414,13.335 14.859,13.335 14.986,13.462 15.494,12.954 15.494,7.874 65.151,7.874 65.913,8.636 65.786,8.763 65.786,12.954 69.469,12.954 69.85,12.573 69.85,3.175 69.723,3.048 69.596,3.175 10.414,3.175

## Silkscreen, mask and mechanical layers (free items; w line width, h text height)
Top Overlay:
  lines w1.5: 0.635,3.11 ccw(c3.237,3.11) 1.397,1.27 ccw(c3.543,3.416) 3.543,0.381 97.295,0.381 ccw(c97.295,3.416) 99.441,1.27 ccw(c97.601,3.11) 100.203,3.11 100.203,76.454 ccw(c97.444,76.454) 99.395,78.405 99.27,78.53 ccw(c97.536,76.795) 97.536,79.248 3.302,79.248 ccw(c3.302,76.795) 1.568,78.53 1.524,78.486 ccw(c3.67,76.34) 0.635,76.34 0.635,3.11

## Text inside footprints (layer, text, board x,y; h text height)
C1: Top Overlay "+" at 59.586,52.384 h1.8 r180
C?: Top Overlay "+" at 60.126,37.652 h1.8 r180
J5: Mechanical 40 "5.029" at 12.773,64.812 h1.8 r270; Mechanical 40 "2.540" at 12.773,62.945 h1.8 r270; Mechanical 40 "2.540" at 16.837,59.262 h1.8 r270; Mechanical 40 "35.560" at 8.524,40.923 h1.8 r270; Mechanical 40 "33.020" at 17.853,40.923 h1.8 r270; Top Overlay "1" at 10.995,59.723 h1.8 r270; Top Overlay "2" at 13.535,59.723 h1.8 r270; Top Overlay "27" at 10.995,21.552 h1.8 r270; Top Overlay "28" at 13.535,21.552 h1.8 r270; Mechanical 16 "1" at 10.995,59.723 h1.8 r270; Mechanical 16 "2" at 13.535,59.723 h1.8 r270; Mechanical 16 "27" at 10.995,21.552 h1.8 r270; Mechanical 16 "28" at 13.535,21.552 h1.8 r270